# Altium PCB PCB1.PcbDoc
Units mm, origin at the board's own origin, x right, y up, seen from the top; angles counter-clockwise.
Board outline 89.99 x 89.99 mm, 2 copper layers (Top Layer, Bottom Layer); 53 components, 50 nets, 176 pads, 16 vias.
Unrouted connection lines stored in the file: 111.
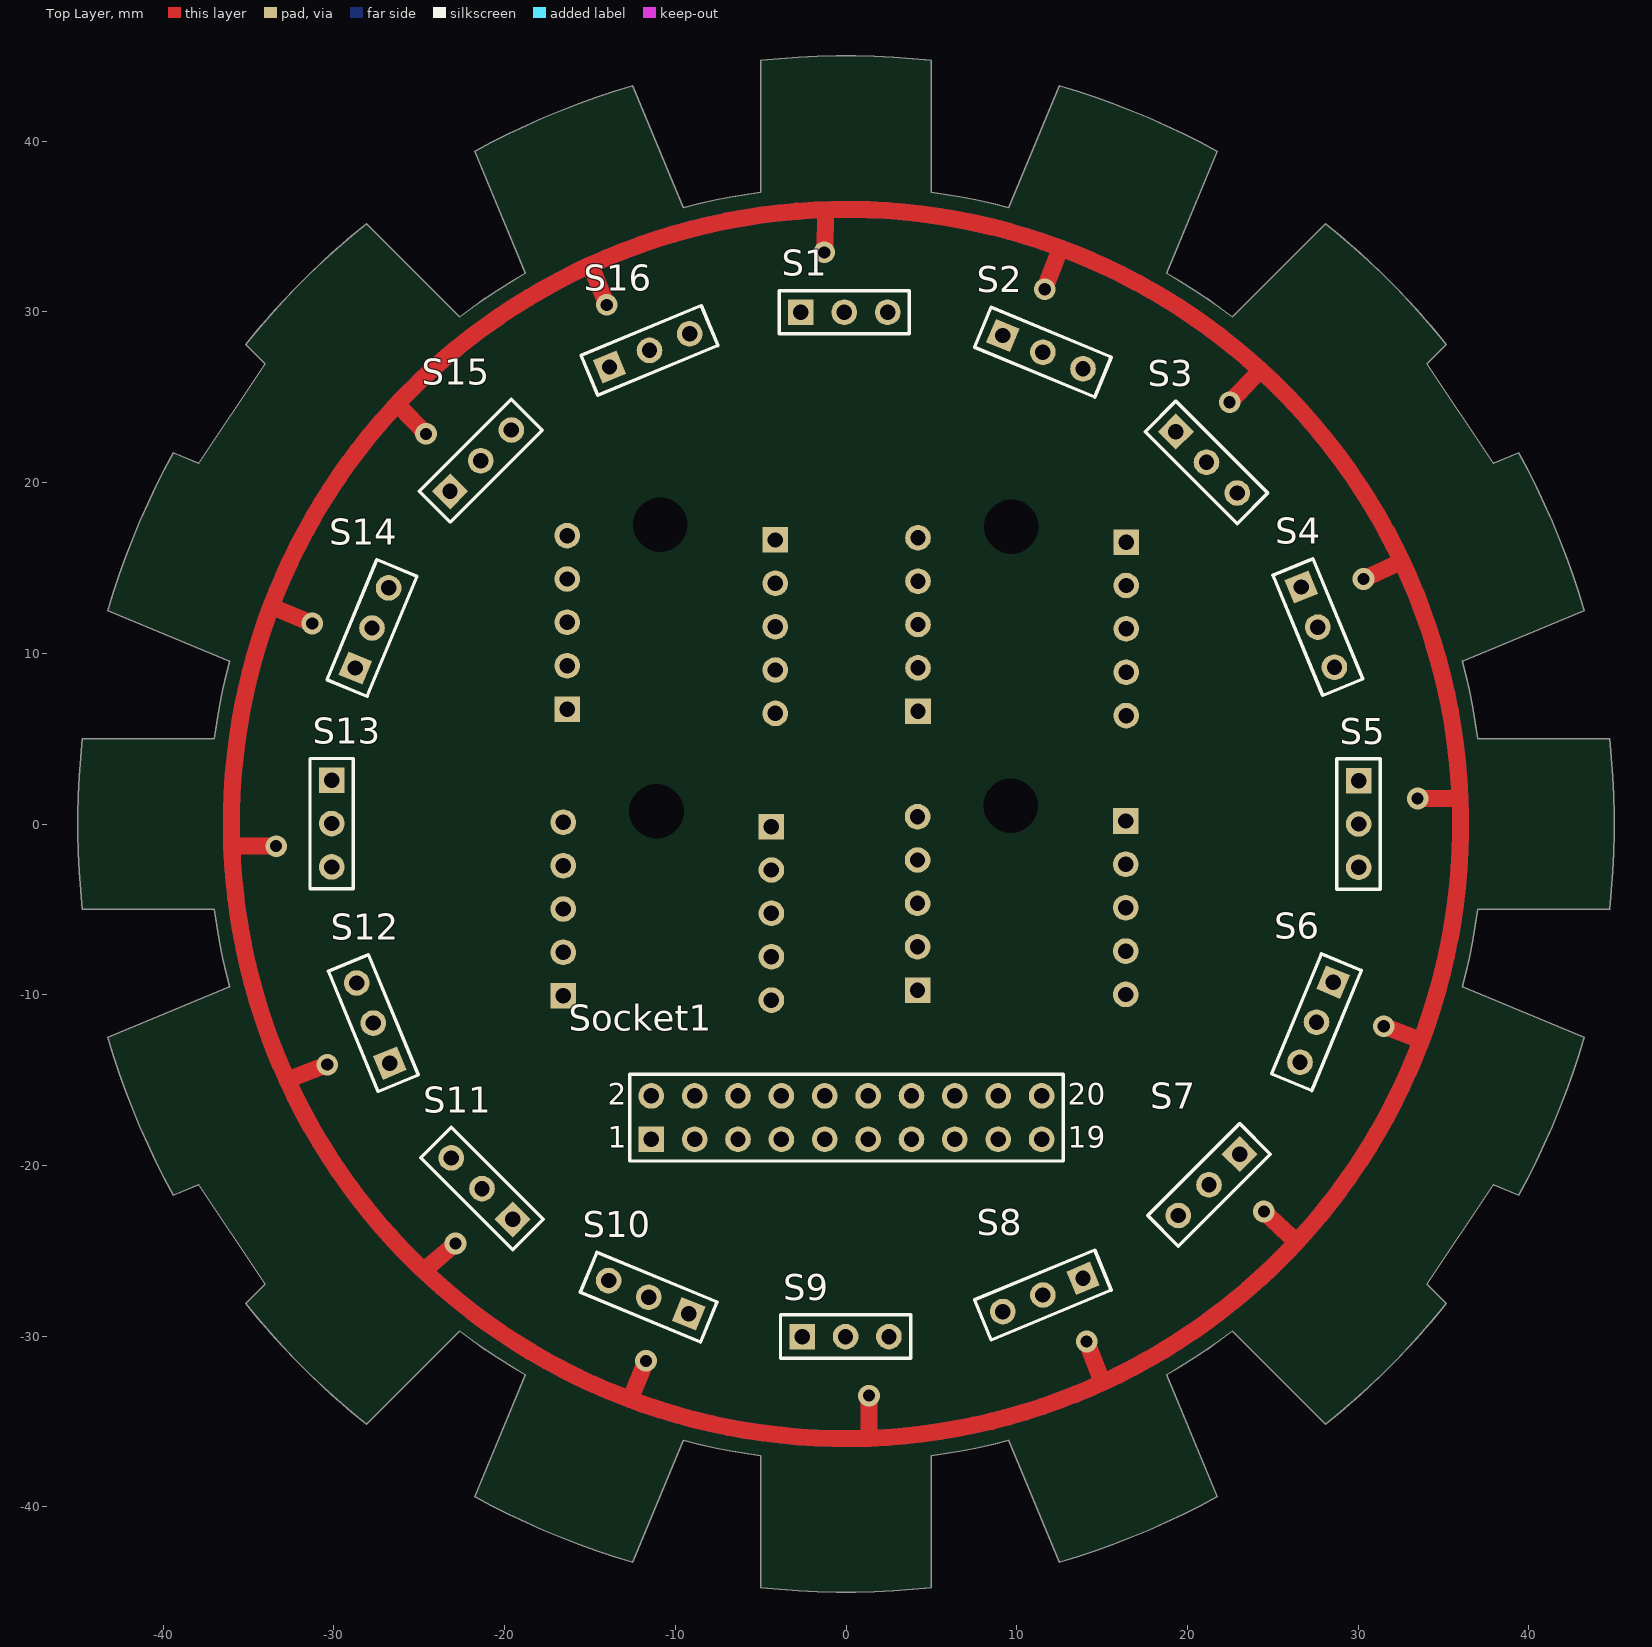
[diagram p0: Top Layer view]
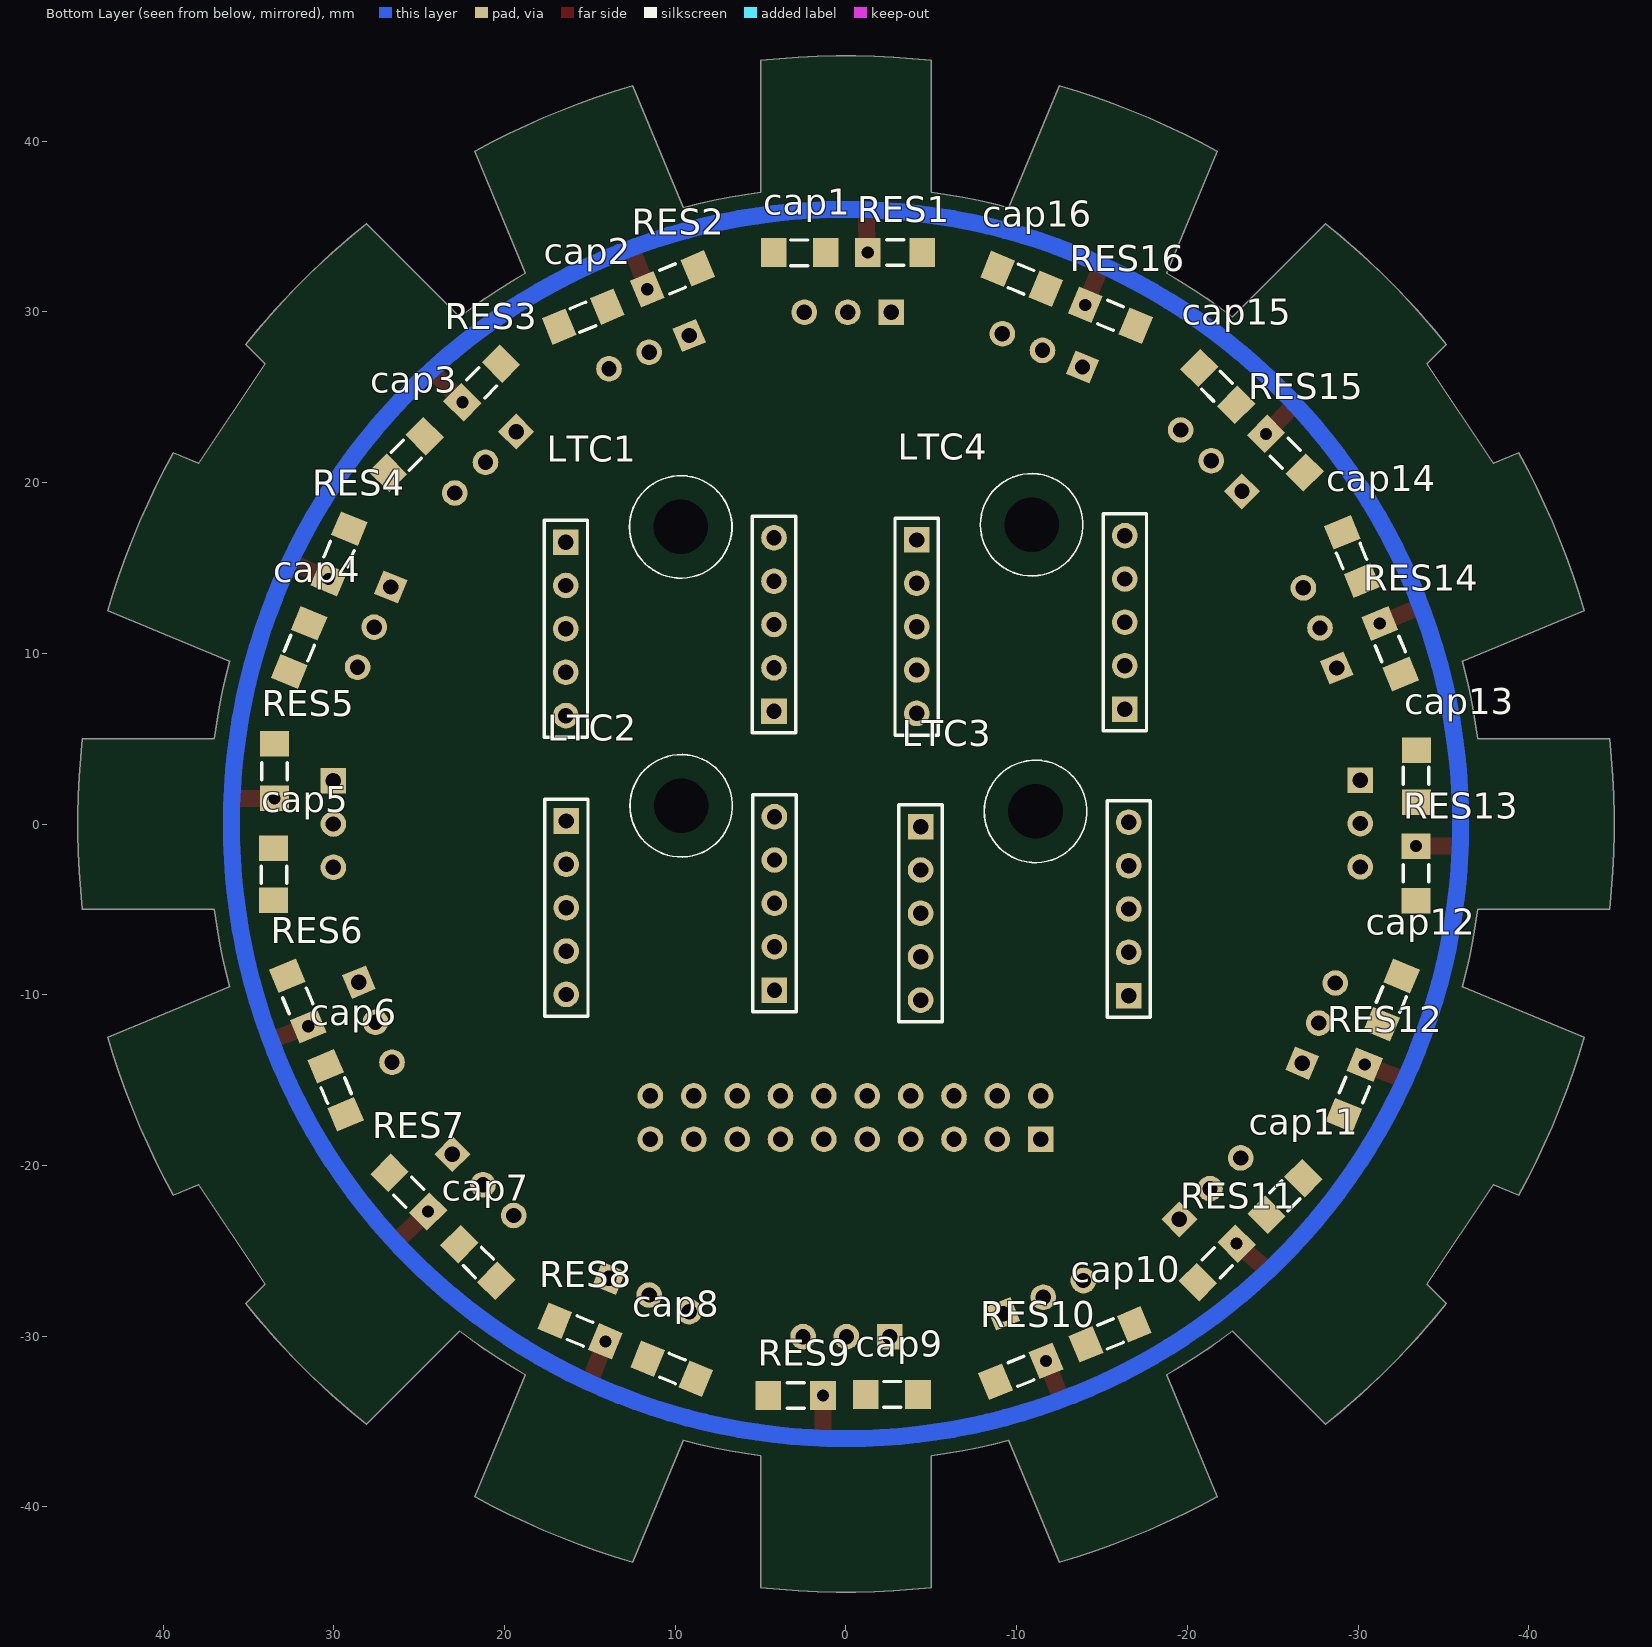
[diagram p1: Bottom Layer view, seen from below]

## Layer stack, top to bottom
Top Solder: solder mask 0.0102, Solder Resist, Dk 3.5
Top Layer: signal copper 0.0356
Dielectric 1: dielectric 0.32, FR-4, Dk 4.8
Bottom Layer: signal copper 0.0356
Bottom Solder: solder mask 0.0102, Solder Resist, Dk 3.5

## Board outline
-34.024,-26.953 -37.922,-21.12 -39.404,-21.734 cw(c0,0) -43.231,-12.495 -36.097,-9.54 cw(c0,0) -37,-5 -44.721,-5 cw(c0,0) -44.721,5 -37,5 cw(c0,0) -36.097,9.54 -43.231,12.495 cw(c0,0) -39.404,21.734 -37.922,21.12 -34.024,26.953 -35.158,28.087 cw(c0,0) -28.087,35.158 -22.627,29.698 cw(c0,0) -18.779,32.27 -21.734,39.404 cw(c0,0) -12.495,43.231 -9.54,36.097 cw(c0,0) -5,37 -5,44.721 cw(c0,0) 5,44.721 5,37 cw(c0,0) 9.54,36.097 12.495,43.231 cw(c0,0) 21.734,39.404 18.779,32.27 cw(c0,0) 22.627,29.698 28.087,35.158 cw(c0,0) 35.158,28.087 34.024,26.953 37.922,21.12 39.404,21.734 cw(c0,0) 43.231,12.495 36.097,9.54 cw(c0,0) 37,5 44.721,5 cw(c0,0) 44.721,-5 37,-5 cw(c0,0) 36.097,-9.54 43.231,-12.495 cw(c0,0) 39.404,-21.734 37.922,-21.12 34.024,-26.953 35.158,-28.087 cw(c0,0) 28.087,-35.158 22.627,-29.698 cw(c0,0) 18.779,-32.27 21.734,-39.404 cw(c0,0) 12.495,-43.231 9.54,-36.097 cw(c0,0) 5,-37 5,-44.721 cw(c0,0) -5,-44.721 -5,-37 cw(c0,0) -9.54,-36.097 -12.495,-43.231 cw(c0,0) -21.734,-39.404 -18.779,-32.27 cw(c0,0) -22.627,-29.698 -28.087,-35.158 cw(c0,0) -35.158,-28.087

## Design rules (kind name [scope] priority, off if disabled: settings)
Clearance [All] p1: gap=0.254 ignorepadtopadclearanceinfootprint=FALSE except(0: Arc-Hole Track-Hole SMDPad-Hole THPad-Hole Via-Hole Fill-Hole Poly-Hole Region-Hole Text-Hole)
PolygonConnect [All] p1: connectstyle=Relief reliefconductorwidth=0.254 reliefentries=4 polygonreliefangle="90 Angle" airgapwidth=0.254
RoutingVias [All] p1: holewidth=0.711 width=1.27 viastyle="Through Hole" minholewidth=0.711 minwidth=1.27 maxholewidth=0.711 maxwidth=1.27
SolderMaskExpansion [All] p1: expansion=0.102
Width [All] p1: maxlimit=2 minlimit=0.4 preferedwidth=1
30 further rules are at their usual default settings.

## Components (designator, comment, footprint, x,y, rotation, side; value= is the part's Value field where it differs from the comment)
cap1 "smd" "Cap SMD" 2.718,33.477 r0 bottom
cap2 "smd" "Cap SMD" 15.392,29.718 r337.5 bottom
cap3 "smd" "Cap SMD" 25.756,21.641 r315 bottom
cap4 "smd" "Cap SMD" 32.029,10.338 r292.5 bottom
cap5 "smd" "Cap SMD" 33.528,-2.946 r270 bottom
cap6 "smd" "Cap SMD" 29.896,-15.596 r247.5 bottom
cap7 "smd" "Cap SMD" 21.565,-25.679 r225 bottom
cap8 "smd" "Cap SMD" 10.211,-31.902 r202.5 bottom
cap9 "smd" "Cap SMD" -2.692,-33.426 r180 bottom
cap10 "smd" "Cap SMD" -15.469,-29.896 r157.5 bottom
cap11 "smd" "Cap SMD" -25.705,-21.819 r135 bottom
cap12 "smd" "Cap SMD" -31.953,-10.312 r112.5 bottom
cap13 "smd" "Cap SMD" -33.401,2.794 r90 bottom
cap14 "smd" "Cap SMD" -29.642,15.672 r67.5 bottom
cap15 "smd" "Cap SMD" -21.768,25.629 r45 bottom
cap16 "smd" "Cap SMD" -10.287,31.928 r22.5 bottom
LTC1 "LTC TAK" "LTC TAK" 9.677,10.287 r90 bottom
LTC2 "LTC TAK" "LTC TAK" 9.652,-6.045 r90 bottom
LTC3 "LTC TAK" "LTC TAK" -11.1,-6.375 r90 bottom
LTC4 "LTC TAK" "LTC TAK" -10.871,10.414 r90 bottom
RES1 "SMD" "Resistor SMD 1206" -2.87,33.477 r0 bottom
RES2 "SMD" "Resistor SMD 1206" 10.16,31.928 r337.5 bottom
RES3 "SMD" "Resistor SMD 1206" 21.336,25.832 r315 bottom
RES4 "SMD" "Resistor SMD 1206" 29.693,15.824 r292.5 bottom
RES5 "SMD" "Resistor SMD 1206" 33.477,3.099 r270 bottom
RES6 "SMD" "Resistor SMD 1206" 32.106,-10.363 r247.5 bottom
RES7 "SMD" "Resistor SMD 1206" 25.603,-21.565 r225 bottom
RES8 "SMD" "Resistor SMD 1206" 15.57,-29.693 r202.5 bottom
RES9 "SMD" "Resistor SMD 1206" 2.946,-33.477 r180 bottom
RES10 "SMD" "Resistor SMD 1206" -10.236,-32.055 r157.5 bottom
RES11 "SMD" "Resistor SMD 1206" -21.742,-25.705 r135 bottom
RES12 "SMD" "Resistor SMD 1206" -29.769,-15.57 r112.5 bottom
RES13 "SMD" "Resistor SMD 1206" -33.376,-2.896 r90 bottom
RES14 "SMD" "Resistor SMD 1206" -31.877,10.262 r67.5 bottom
RES15 "SMD" "Resistor SMD 1206" -25.73,21.717 r45 bottom
RES16 "SMD" "Resistor SMD 1206" -15.494,29.794 r22.5 bottom
S1 "Header 3" HDR1X3 -2.642,29.972 r0 top
S2 "Header 3" HDR1X3 9.185,28.607 r337.5 top
S3 "Header 3" HDR1X3 19.32,22.98 r315 top
S4 "Header 3" HDR1X3 26.663,13.878 r292.5 top
S5 "Header 3" HDR1X3 30.023,2.54 r270 top
S6 "Header 3" HDR1X3 28.531,-9.261 r247.5 top
S7 "Header 3" HDR1X3 23.056,-19.337 r225 top
S8 "Header 3" HDR1X3 13.878,-26.612 r202.5 top
S9 "Header 3" HDR1X3 -2.565,-30.023 r0 top
S10 "Header 3" HDR1X3 -9.21,-28.683 r157.5 top
S11 "Header 3" HDR1X3 -19.522,-23.15 r135 top
S12 "Header 3" HDR1X3 -26.714,-14.005 r112.5 top
S13 "Header 3" HDR1X3 -30.124,2.565 r270 top
S14 "Header 3" HDR1X3 -28.734,9.134 r67.5 top
S15 "Header 3" HDR1X3 -23.19,19.482 r45 top
S16 "Header 3" HDR1X3 -13.853,26.765 r22.5 top
Socket1 "IDC2x10" "IDC 2x10" -11.405,-18.466 r0 top

## Footprints (in the part's own frame and the unit in brackets; to place one, negate y for a bottom-side part, rotate by r counter-clockwise, add the part's x,y. Pads: shape width x height; smd on the part's side, far side on the other; paste and mask are expansions set on the pad)
"Cap SMD" [mm]
  rect 1.5x1.7 smd: 1(-1.525,0) 2(1.525,0)
  silkscreen extent -0.47,-0.72 0.53,0.78, body extent -1.49,-0.76 1.55,0.76, height 0.75
HDR1X3 [mm] "Connector; Header; 3 Position"
  rect 1.5x1.5 hole 0.9: 1(0,0)
  round 1.5 hole 0.9: 2(2.54,0) 3(5.08,0)
  silkscreen extent -1.27,-1.27 6.35,1.27
"IDC 2x10" [mm]
  rect 1.5x1.5 hole 0.9: 1(0,0)
  round 1.5 hole 0.9: 2(0,2.54) 3(2.54,0) 4(2.54,2.54) 5(5.08,0) 6(5.08,2.54) 7(7.62,0) 8(7.62,2.54) 9(10.16,0) 10(10.16,2.54) 11(12.7,0) 12(12.7,2.54) 13(15.24,0) 14(15.24,2.54) 15(17.78,0) 16(17.78,2.54) 17(20.32,0) 18(20.32,2.54) 19(22.86,0) 20(22.86,2.54)
  silkscreen extent -1.27,-1.27 24.13,3.81, body extent -5.08,-3.51 27.94,5.59, height 2.1
"LTC TAK" [mm]
  rect 1.5x1.5 hole 0.9: 1(6.223,6.731) 6(-3.683,-5.461)
  round 1.5 hole 0.9: 2(3.683,6.731) 3(1.143,6.731) 4(-1.397,6.731) 5(-3.937,6.731) 7(-1.143,-5.461) 8(1.397,-5.461) 9(3.937,-5.461) 10(6.477,-5.461)
  round 1.524 hole 3.2: 2(7.112,0)
  silkscreen extent -5.21,-6.73 10.11,8
"Resistor SMD 1206" [mm]
  rect 1.5x1.7 smd: 1(-1.6,0) 2(1.6,0)
  silkscreen extent -0.5,-0.75 0.5,0.75, body extent -1.6,-0.8 1.6,0.8, height 0.55

## Part data
cap1 cap2 cap3 cap4 cap5 cap6 cap7 cap8 cap9 cap10 cap11 cap12 cap13 cap14 cap15 cap16: library part "Cap SMD"
RES1 RES2 RES3 RES4 RES5 RES6 RES7 RES8 RES9 RES10 RES11 RES12 RES13 RES14 RES15 RES16: library part "Res SMD"
S1 S2 S3 S4 S5 S6 S7 S8 S9 S10 S11 S12 S13 S14 S15 S16: "Header, 3-Pin", LatestRevisionDate=17-Jul-2002, LatestRevisionNote="Re-released for DXP Platform.", Publisher="Altium Limited"
Socket1: library part "IDC 2x10"

## Via types
v1: diameter 1.27, hole 0.711, Top Layer to Bottom Layer, 16 vias

## Nets (pads, with @x,y where several pads share a name; then routed paths per layer and width w, separated by ;. In a path a pad name is that pad's centre, name@x,y a point inside that pad or via, vN(x,y) a via of type N, cw(c..) or ccw(c..) an arc to the next point about the centre after c; other vN are vias at no path point)
CR1: cap1.1 S1.1
CR2: cap6.1 S2.1
CR3: cap7.1 S3.1
CR4: cap10.1 S4.1
CR5: cap13.1 S5.1
CR6: cap2.1 S6.1
CR7: cap4.1 S7.1
CR8: cap8.1 S8.1
CR9: cap11.1 S9.1
CR10: cap14.1 S10.1
CR11: cap3.1 S11.1
CR12: cap5.1 S12.1
CR13: cap9.1 S13.1
CR14: cap12.1 S14.1
CR15: cap15.1 S15.1
CR16: cap16.1 S16.1
GND: cap1.2 cap2.2 cap3.2 cap4.2 cap5.2 cap6.2 cap7.2 cap8.2 cap9.2 cap10.2 cap11.2 cap12.2 cap13.2 cap14.2 cap15.2 cap16.2 LTC1.10 LTC2.10 LTC3.10 LTC4.10 RES1.1 RES2.1 RES3.1 RES4.1 RES5.1 RES6.1 RES7.1 RES8.1 RES9.1 RES10.1 RES11.1 RES12.1 RES13.1 RES14.1 RES15.1 RES16.1 S1.2 S2.2 S3.2 S4.2 S5.2 S6.2 S7.2 S8.2 S9.2 S10.2 S11.2 S12.2 S13.2 S14.2 S15.2 S16.2 Socket1.11 | length 226.2
  Bottom Layer w1: 36,0 ccw(c0,0) 36,0
L1: LTC1.9 S1.3
L2: LTC1.8 S2.3
L3: LTC1.7 S3.3
L4: LTC1.6 S4.3
L5: LTC2.9 S5.3
L6: LTC2.8 S6.3
L7: LTC2.7 S7.3
L8: LTC2.6 S8.3
L9: LTC3.9 S9.3
L10: LTC3.8 S10.3
L11: LTC3.7 S11.3
L12: LTC3.6 S12.3
L13: LTC4.9 S13.3
L14: LTC4.8 S14.3
L15: LTC4.7 S15.3
L16: LTC4.6 S16.3
S1: LTC1.2 Socket1.13
S2: LTC1.3 Socket1.15
S3: LTC1.4 Socket1.17
S4: LTC1.5 Socket1.19
S5: LTC2.2 Socket1.14
S6: LTC2.3 Socket1.16
S7: LTC2.4 Socket1.18
S8: LTC2.5 Socket1.20
S9: LTC3.2 Socket1.2
S10: LTC3.3 Socket1.4
S11: LTC3.4 Socket1.6
S12: LTC3.5 Socket1.8
S13: LTC4.2 Socket1.1
S14: LTC4.3 Socket1.3
S15: LTC4.4 Socket1.5
S16: LTC4.5 Socket1.7
VCC: LTC1.1 LTC2.1 LTC3.1 LTC4.1 RES1.2 RES2.2 RES3.2 RES4.2 RES5.2 RES6.2 RES7.2 RES8.2 RES9.2 RES10.2 RES11.2 RES12.2 RES13.2 RES14.2 RES15.2 RES16.2 Socket1.9 Socket1.10 | length 267.7
  Top Layer w1: v1(-33.376,-1.296) -35.977,-1.295 ; v1(-31.265,11.74) -33.666,12.752 ; v1(-30.381,-14.092) -32.732,-14.987 ; -26.2,24.5 v1(-24.599,22.848) ; -24.725,-26.166 v1(-22.874,-24.573) ; v1(-14.016,30.406) -14.964,32.743 ; -12.64,-33.708 v1(-11.714,-31.443) ; v1(-1.27,33.477) -1.167,35.9 ; v1(1.346,-33.477) 1.349,-35.975 ; v1(11.638,31.316) 12.56,33.738 ; v1(14.092,-30.305) 15.01,-32.722 ccw(c0,0) 26.391,-24.485 ; 16.265,-32.116 cw(c0,0) -32.732,-14.987 ; v1(22.467,24.7) 24.276,26.583 ; v1(24.472,-22.696) 26.391,-24.485 ; v1(30.305,14.346) 32.547,15.385 ; v1(31.493,-11.841) 33.694,-12.676 ; v1(33.477,1.499) 35.969,1.503 ; -35.977,-1.295 ccw(c0,0) -32.732,-14.987 ; -35.977,-1.295 cw(c0,0) -33.666,12.752 ; -33.666,12.752 cw(c0,0) -28.519,21.969 cw(c0,0) -14.964,32.743 ; -14.964,32.743 cw(c0,0) 12.56,33.738 ; 12.56,33.738 cw(c0,0) 24.276,26.583 ; 24.276,26.583 cw(c0,0) 32.547,15.385 ; 26.391,-24.485 ccw(c0,0) 33.694,-12.676 ; 32.547,15.385 cw(c0,0) 35.969,1.503 ; 33.694,-12.676 ccw(c0,0) 35.969,1.503
pads on no net: Socket1.12

## Silkscreen, mask and mechanical layers (free items; w line width, h text height)
Mechanical 1:
  circle w0: c-33.479,-22.37 r1.5
  circle w0: c-33.479,22.37 r1.5
  circle w0: c33.479,22.37 r1.5
  circle w0: c33.479,-22.37 r1.5
  lines w0: -44.721,-5 cw(c0,0) -44.721,5 -37,5 cw(c0,0) -36.097,9.54 -43.231,12.495 cw(c0,0) -39.404,21.734 -37.922,21.12 -34.024,26.953 -35.158,28.087 cw(c0,0) -28.087,35.158 -22.627,29.698 cw(c0,0) -18.779,32.27 -21.734,39.404 cw(c0,0) -12.495,43.231 -9.54,36.097 cw(c0,0) -5,37 -5,44.721 cw(c0,0) 5,44.721 5,37 cw(c0,0) 9.54,36.097 12.495,43.231 cw(c0,0) 21.734,39.404 18.779,32.27 cw(c0,0) 22.627,29.698 28.087,35.158 cw(c0,0) 35.158,28.087 34.024,26.953 37.922,21.12 39.404,21.734 cw(c0,0) 43.231,12.495 36.097,9.54 cw(c0,0) 37,5 44.721,5 cw(c0,0) 44.721,-5 37,-5 cw(c0,0) 36.097,-9.54 43.231,-12.495 cw(c0,0) 39.404,-21.734 37.922,-21.12 34.024,-26.953 35.158,-28.087 cw(c0,0) 28.087,-35.158 22.627,-29.698 cw(c0,0) 18.779,-32.27 21.734,-39.404 cw(c0,0) 12.495,-43.231 9.54,-36.097 cw(c0,0) 5,-37 5,-44.721 cw(c0,0) -5,-44.721 -5,-37 cw(c0,0) -9.54,-36.097 -12.495,-43.231 cw(c0,0) -21.734,-39.404 -18.779,-32.27 cw(c0,0) -22.627,-29.698 -28.087,-35.158 cw(c0,0) -35.158,-28.087 -34.024,-26.953 -37.922,-21.12 -39.404,-21.734 cw(c0,0) -43.231,-12.495 -36.097,-9.54 cw(c0,0) -37,-5 -44.721,-5

## Text inside footprints (layer, text, board x,y; h text height)
Socket1: Top Overlay "20" at 12.979,-16.434 h1.27; Top Overlay "19" at 12.979,-18.974 h1.27; Top Overlay "1" at -13.945,-18.974 h1.27; Top Overlay "2" at -13.945,-16.434 h1.27